# EAGLE board Arduino-Pro-v12 (EAGLE 5.08)
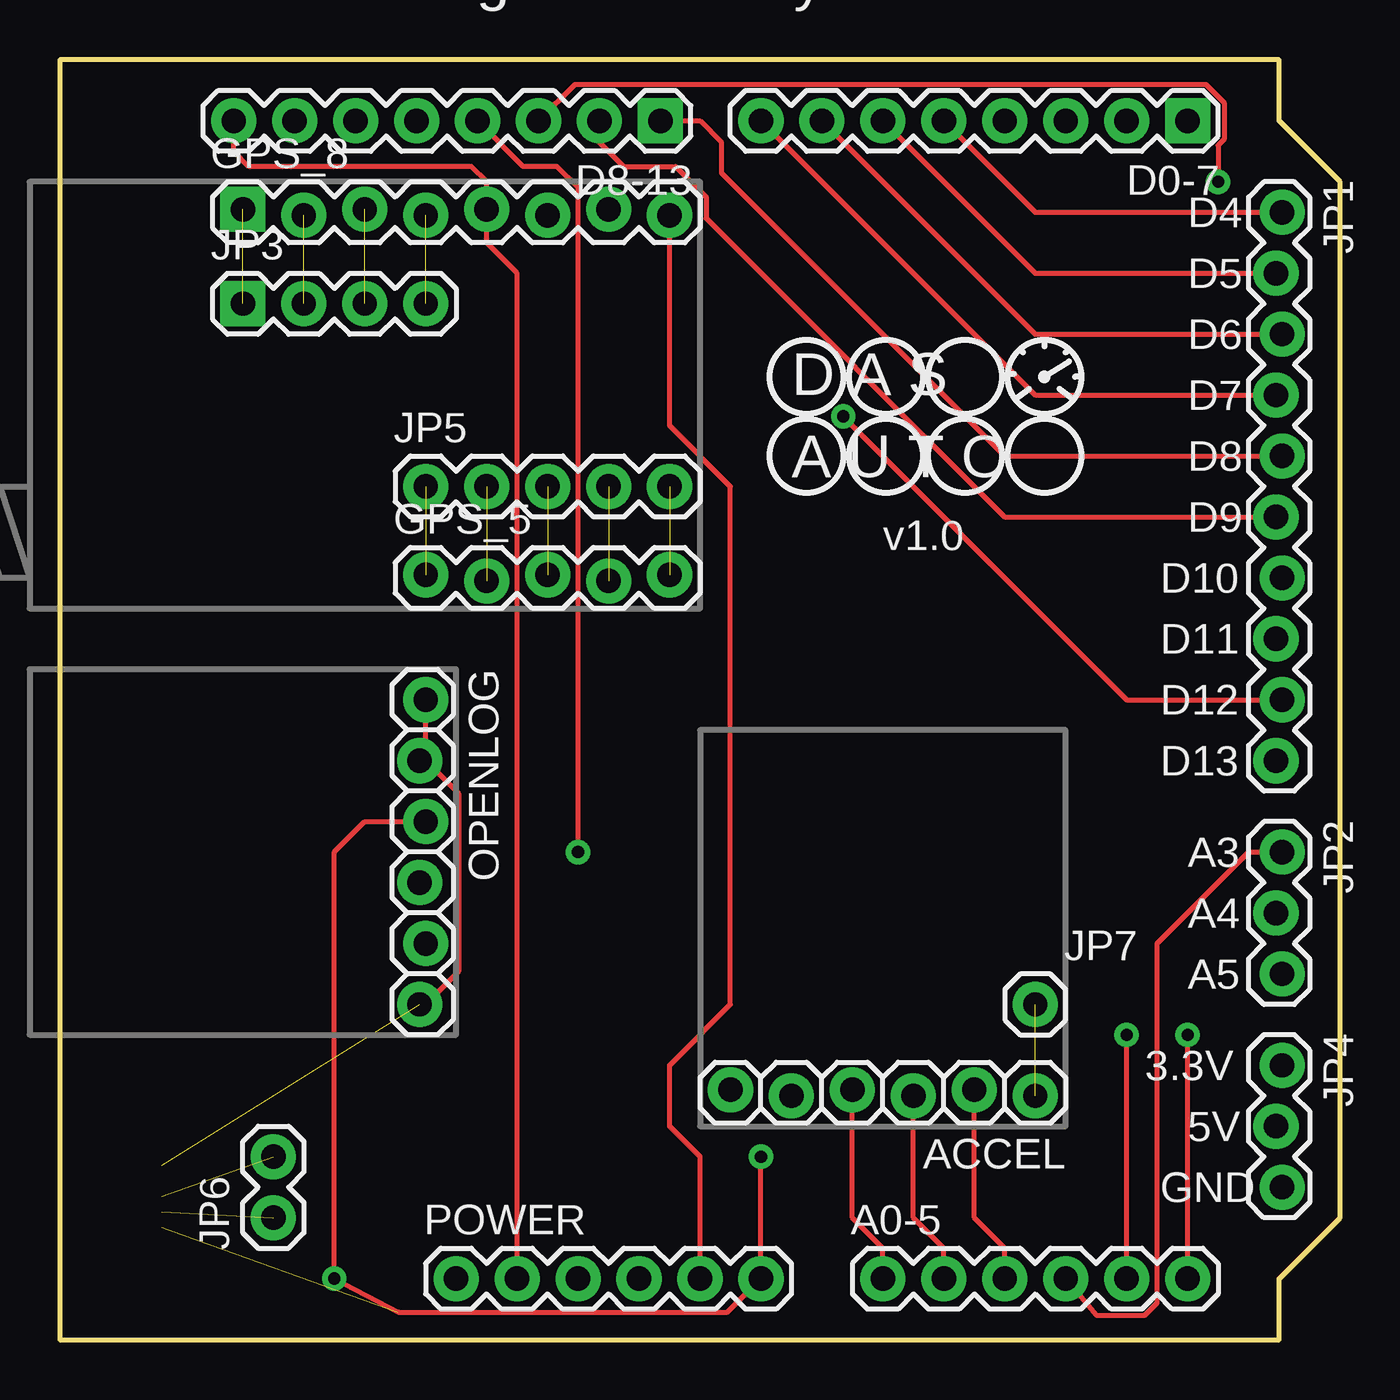
[diagram p0: board, top side]
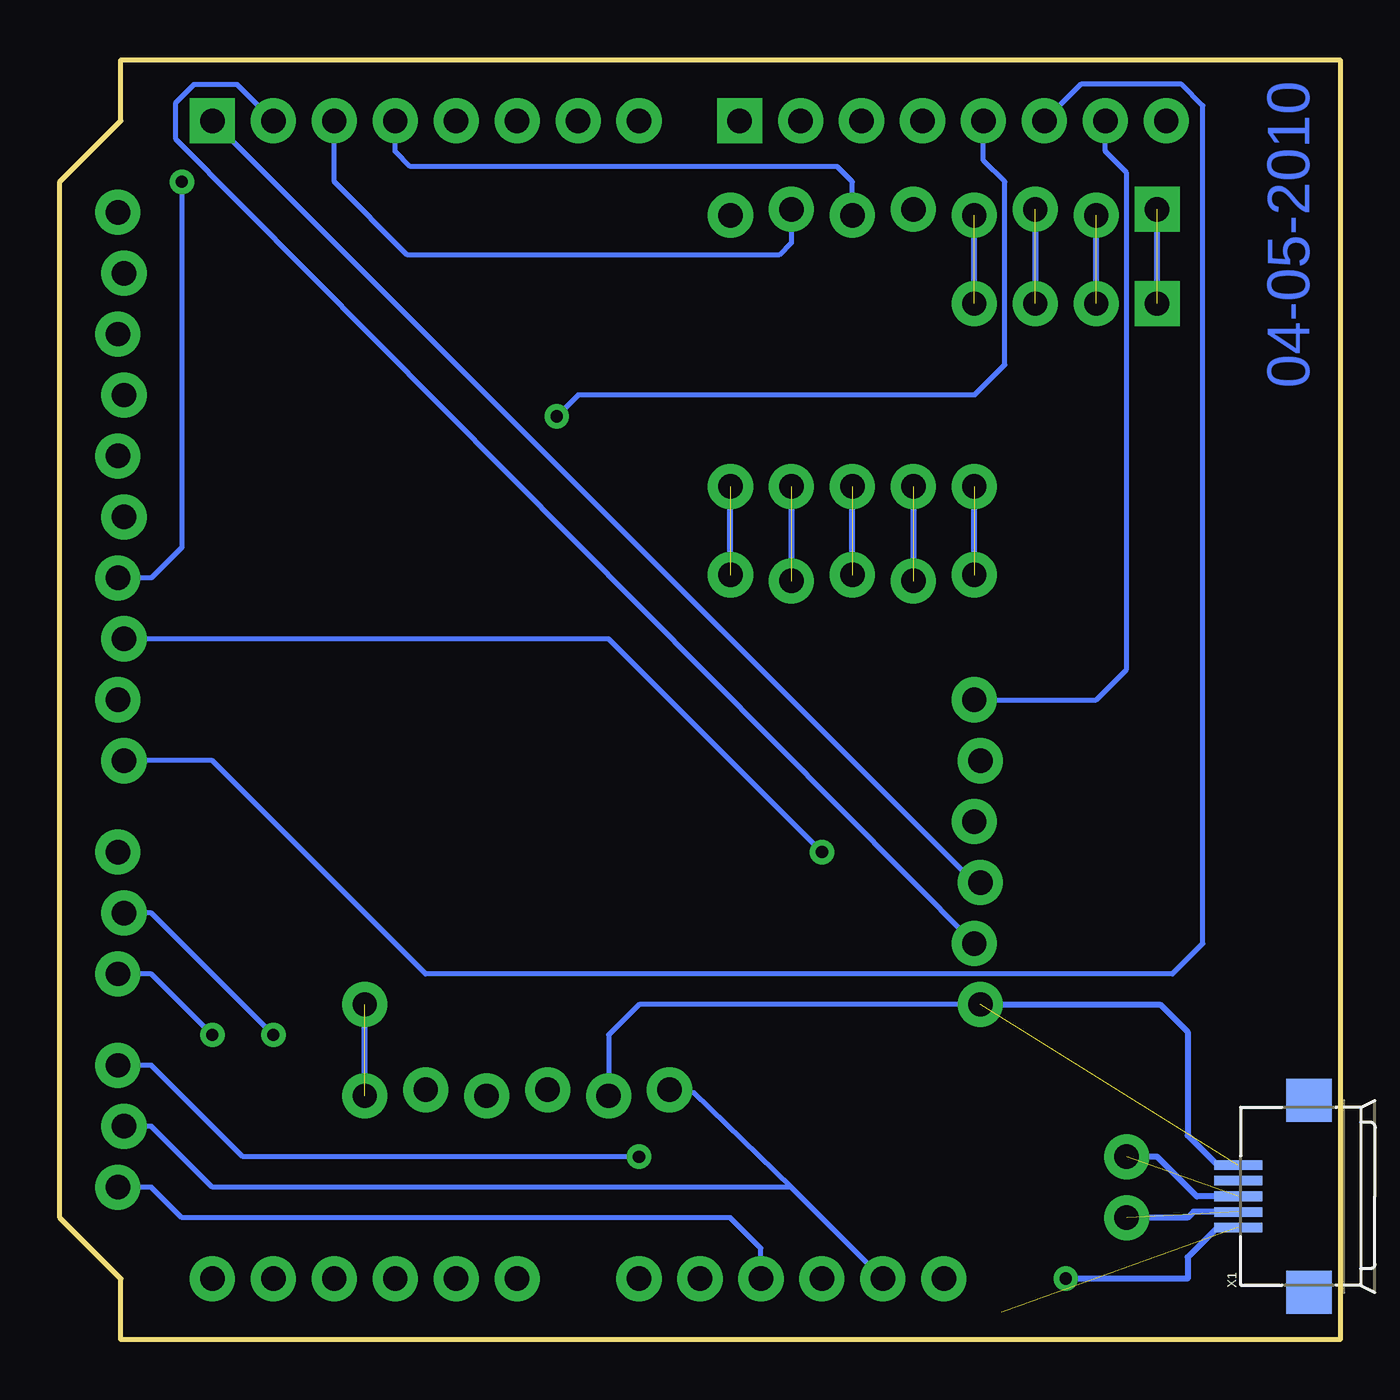
[diagram p1: board, bottom side, seen from below]

Size 53.34 x 53.34 mm. Coordinates in mm from the lower left corner, seen from the top.
Outline: 0,53.34 0,0 50.8,0 50.8,2.54 53.34,5.08 53.34,48.26 50.8,50.8 50.8,53.34 0,53.34
Copper layers (1*16): Top 0.035mm / dielectric 1.5mm / Bottom 0.035mm
Design rules "SparkFun": minimum track width 8mil, minimum drill 20mil, track to track 8mil, track to pad 8mil, pad to pad 8mil, via to via 8mil, smd to smd 8mil, copper to edge 10mil, drill to drill 8mil, minimum pad ring 12mil, minimum via ring 10mil, stop-mask expansion 4mil, vias tented up to drill 20mil, thermal gap 10mil
Net classes: 0 default: width 0.203 mm; 1 vcc: width 0.254 mm

## Footprints (pad centres in the part's own frame; a part is rotated, then mirrored left to right if it is on the bottom)
1X06 = drill 1.016 pad 1.88 round: 1 0,0; 2 2.54,0; 3 5.08,0; 4 7.62,0; 5 10.16,0; 6 12.7,0
1X06_LOCK = drill 1.016 pad 1.88 round: 1 0,0; 2 2.54,-0.254; 3 5.08,0; 4 7.62,-0.254; 5 10.16,0; 6 12.7,-0.254
1X08 = drill 1.016 pad 1.88 square: 1 0,0 | drill 1.016 pad 1.88 round: 2 2.54,0; 3 5.08,0; 4 7.62,0; 5 10.16,0; 6 12.7,0; 7 15.24,0; 8 17.78,0
1X05_LOCK = drill 1.016 pad 1.88 round: 1 0,0.127; 2 2.54,-0.127; 3 5.08,0.127; 4 7.62,-0.127; 5 10.16,0.127
1X08_LOCK = drill 1.016 pad 1.88 square: 1 0,0.127 | drill 1.016 pad 1.88 round: 2 2.54,-0.127; 3 5.08,0.127; 4 7.62,-0.127; 5 10.16,0.127; 6 12.7,-0.127; 7 15.24,0.127; 8 17.78,-0.127
1X10_LOCK = drill 1.016 pad 1.88 round: 1 0,0.127; 2 2.54,-0.127; 3 5.08,0.127; 4 7.62,-0.127; 5 10.16,0.127; 6 12.7,-0.127; 7 15.24,0.127; 8 17.78,-0.127; 9 20.32,0.127; 10 22.86,-0.127
1X03_LOCK = drill 1.016 pad 1.88 round: 1 0,0.127; 2 2.54,-0.127; 3 5.08,0.127
1X04 = drill 1.016 pad 1.88 square: 1 0,0 | drill 1.016 pad 1.88 round: 2 2.54,0; 3 5.08,0; 4 7.62,0
1X05 = drill 1.016 pad 1.88 round: 1 0,0; 2 2.54,0; 3 5.08,0; 4 7.62,0; 5 10.16,0
1X02 = drill 1.016 pad 1.88 round: 1 0,0; 2 2.54,0
1X01 = drill 1.016 pad 1.88 round: 1 0,0
USB-MICROB = smd 0.4 x 2: D+ 0,3.1; D- -0.65,3.1; GND 1.3,3.1; ID 0.65,3.1; VBUS -1.3,3.1 | smd 1.8 x 1.9: GND@2 -4,0.15; GND@3 4,0.15

## Placement (x,y rotation side)
A0-5  [1X06]  34.29,2.54 0 top
ACCEL  [1X06_LOCK]  40.64,10.16 180 top
D0-7  [1X08]  46.99,50.8 180 top
D8-13  [1X08]  25.02,50.8 180 top
GPS_5  [1X05_LOCK]  15.24,31.75 0 top
GPS_8  [1X08_LOCK]  7.62,46.99 0 top
JP1  M10LOCK  [1X10_LOCK]  50.8,46.99 270 top
JP2  [1X03_LOCK]  50.8,20.32 270 top
JP3  [1X04]  7.62,43.18 0 top
JP4  [1X03_LOCK]  50.8,11.43 270 top
JP5  [1X05]  15.24,35.56 0 top
JP6  [1X02]  8.89,5.08 90 top
JP7  M01PTH  [1X01]  40.64,13.97 0 top
OPENLOG  [1X06_LOCK]  15.24,26.67 270 top
POWER  POWER  [1X06]  16.51,2.54 0 top
X1  USB-MICROB  [USB-MICROB]  1.14,5.97 90 bottom

## Library data of the parts
A0-5 ACCEL D0-7 D8-13 GPS_5 GPS_8 JP1-JP7 OPENLOG POWER X1 = SparkFun

## Nets
N$1: GPS_8.8 POWER.5
N$2: ACCEL.5 D8-13.7 OPENLOG.1 OPENLOG.2 OPENLOG.6 X1.GND
N$3: D0-7.3 GPS_8.7
N$4: D0-7.4 GPS_8.6
N$5: JP4.3 POWER.4
N$7: A0-5.1 ACCEL.4
N$8: A0-5.2 ACCEL.3
N$9: A0-5.3 ACCEL.2
N$10: D0-7.1 OPENLOG.4
N$11: D0-7.2 OPENLOG.5
N$12: JP4.1 OPENLOG.3 POWER.6 X1.VBUS
N$13: D8-13.6 JP1.10
N$14: D8-13.5 JP1.9
N$15: D8-13.4 JP1.8
N$16: D8-13.3 JP1.7
N$17: D8-13.2 JP1.6
N$18: D8-13.1 JP1.5
N$19: D0-7.5 JP1.1
N$20: D0-7.6 JP1.2
N$21: D0-7.7 JP1.3
N$22: D0-7.8 JP1.4
N$23: A0-5.6 JP2.3
N$24: A0-5.5 JP2.2
N$25: A0-5.4 JP2.1
N$26: ACCEL.6 D8-13.8 GPS_8.5 JP4.2 POWER.2
N$28: JP6.2 X1.D+
N$29: JP6.1 X1.D-
N$30: ACCEL.1 JP7.1
N$31: GPS_8.1 JP3.1
N$32: GPS_8.2 JP3.2
N$33: GPS_8.3 JP3.3
N$34: GPS_8.4 JP3.4
N$35: GPS_5.5 JP5.5
N$36: GPS_5.4 JP5.4
N$37: GPS_5.3 JP5.3
N$38: GPS_5.2 JP5.2
N$39: GPS_5.1 JP5.1

## Tracks (layer width: path | path; a pad name or v marks a point on that pad's centre or on a via)
N$1
  Top 0.203: POWER.5 26.67,7.62 25.4,8.89 25.4,11.43 27.94,13.97 27.94,35.56 25.4,38.1 GPS_8.8 25.4,46.99
N$2  (1 unrouted)
  Top 0.203: 15.24,24.13 16.64,22.73 16.64,15.37 15.24,13.97 OPENLOG.6 | 15.24,24.13 OPENLOG.1 | 15.24,24.13 OPENLOG.2
  Bottom 0.203: ACCEL.5 30.48,12.7 29.21,13.97 15.24,13.97 OPENLOG.6 | OPENLOG.1 10.16,26.67 8.89,27.94 8.89,48.64 9.78,49.53 D8-13.7
  Bottom 0.254: 15.24,13.97 7.49,13.97 6.35,12.83 6.35,8.51 5.08,7.24
N$3
  Bottom 0.203: D0-7.3 41.91,48.26 38.86,45.21 23.37,45.21 22.86,45.72 GPS_8.7
N$4
  Bottom 0.203: D0-7.4 39.37,49.53 38.73,48.9 20.96,48.9 20.32,48.26 GPS_8.6
N$5
  Bottom 0.203: POWER.4 24.13,3.81 25.4,5.08 48.26,5.08 49.53,6.35 JP4.3
N$6  (via drill 0.51)
  other vias: 11.43,2.54
N$7
  Top 0.203: A0-5.1 34.29,3.81 33.02,5.08 ACCEL.4
N$8
  Top 0.203: A0-5.2 36.83,3.81 35.56,5.08 ACCEL.3
N$9
  Top 0.203: A0-5.3 39.37,3.81 38.1,5.08 ACCEL.2
N$10
  Bottom 0.203: D0-7.1 15.24,19.05 OPENLOG.4
N$11
  Bottom 0.203: OPENLOG.5 48.51,50.04 48.51,51.56 47.75,52.32 45.97,52.32 D0-7.2
N$12  (via drill 0.51)  (1 unrouted)
  Top 0.203: OPENLOG.3 12.7,21.59 11.43,20.32 11.43,2.54 14.1,1.14 27.81,1.14 POWER.6 v29.21,7.62
  Bottom 0.203: v29.21,7.62 45.72,7.62 49.53,11.43 JP4.1
N$13
  Bottom 0.203: D8-13.6 10.79,52.32 6.6,52.32 5.71,51.44 5.71,16.51 6.98,15.24 38.1,15.24 46.99,24.13 JP1.10 50.8,24.13
N$14  (via drill 0.51)
  Top 0.203: v32.64,38.48 44.45,26.67 JP1.9
  Bottom 0.203: D8-13.5 14.86,49.15 13.97,48.26 13.97,40.64 15.24,39.37 31.75,39.37 v32.64,38.48
N$15  (via drill 0.51)
  Top 0.203: D8-13.4 19.3,48.9 20.7,48.9 21.59,48.01 v21.59,20.32
  Bottom 0.203: v21.59,20.32 30.48,29.21 JP1.8 50.8,29.21
N$16  (via drill 0.51)
  Top 0.203: D8-13.3 21.46,52.32 47.75,52.32 48.51,51.56 48.51,50.04 48.26,49.78 v48.26,48.26
  Bottom 0.203: v48.26,48.26 48.26,33.02 49.53,31.75 JP1.7
N$17
  Top 0.203: D8-13.2 22.48,49.91 23.5,48.9 25.65,48.9 26.92,47.62 26.92,46.74 39.37,34.29 JP1.6 50.8,34.29
N$18
  Top 0.203: D8-13.1 26.67,50.8 27.56,49.91 27.56,48.64 39.37,36.83 JP1.5
N$19
  Top 0.203: D0-7.5 40.64,46.99 JP1.1
N$20
  Top 0.203: D0-7.6 40.64,44.45 JP1.2 50.8,44.45
N$21
  Top 0.203: D0-7.7 40.64,41.91 JP1.3
N$22
  Top 0.203: D0-7.8 40.64,39.37 JP1.4 50.8,39.37
N$23  (via drill 0.51)
  Top 0.203: A0-5.6 v46.99,12.7
  Bottom 0.203: v46.99,12.7 49.53,15.24 JP2.3
N$24  (via drill 0.51)
  Top 0.203: A0-5.5 v44.45,12.7
  Bottom 0.203: v44.45,12.7 49.53,17.78 JP2.2 50.8,17.78
N$25
  Top 0.203: A0-5.4 43.18,1.02 45.21,1.02 45.72,1.52 45.72,16.51 49.53,20.32 JP2.1
N$26
  Top 0.203: POWER.2 19.05,44.45 17.78,45.72 GPS_8.5 17.78,48.26 17.14,48.9 7.87,48.9 7.24,49.53 D8-13.8
  Bottom 0.203: POWER.2 22.86,6.35 | 22.86,6.35 26.92,10.29 27.94,10.29 ACCEL.6 | 22.86,6.35 46.99,6.35 49.53,8.89 JP4.2 50.8,8.89
N$27
  Bottom 0.254: 11.43,2.54 6.35,2.54 6.35,3.43 5.08,4.7
N$28  (1 unrouted)
  Bottom 0.254: 4.19,5.97 5.97,5.97 7.62,7.62 JP6.2
N$29  (1 unrouted)
  Bottom 0.254: 4.19,5.33 6.1,5.33 6.35,5.08 JP6.1
N$30  (1 unrouted)
  Bottom 0.254: ACCEL.1 JP7.1
N$31  (1 unrouted)
  Bottom 0.254: JP3.1 7.62,46.99
N$32  (1 unrouted)
  Bottom 0.254: JP3.2 10.16,46.99
N$33  (1 unrouted)
  Bottom 0.254: 12.7,46.99 JP3.3
N$34  (1 unrouted)
  Bottom 0.254: JP3.4 15.24,46.99
N$35  (1 unrouted)
  Bottom 0.254: 25.4,31.75 JP5.5
N$36  (1 unrouted)
  Bottom 0.254: JP5.4 22.86,31.75
N$37  (1 unrouted)
  Bottom 0.254: 20.32,31.75 JP5.3
N$38  (1 unrouted)
  Bottom 0.254: JP5.2 17.78,31.75
N$39  (1 unrouted)
  Bottom 0.254: 15.24,31.75 JP5.1

## Text on the board
Bottom: 04-05-2010
tPlace: Released under the Creative Commons Attribution Share-Alike 3.0 License | http://creativecommons.org/licenses/by-sa/3.0 | D4 | D5 | D6 | D A S | D7 | A U T O | D8 | D9 | v1.0 | D10 | D11 | D12 | D13 | A3 | A4 | A5 | 3.3V | 5V | GND
tValues: Arduino Pro | DNP | DNP | Production: DNP | DNP | JST-Right Angle | Production: DNP | Proto: 2x3 male header up | Right-angle 6-pin | DNP | DNP | DNP | DNP | DNP | DNP | Right-angle slide switch | Depending on the flavor, populate: | 8MHz Resonator/3.3V Regulator/ATmega168V | 16MHz Resonator/5V Regulator/ATmega168 | 20MHz Resonator/5V Regulator/ATmega168 | Mark the white boxes accordingly
tDocu: Venus634LPx | OpenLog | ADXL335 | USB